# EAGLE board Cool Kup (EAGLE 9.7.0)

Size 293.31 x 112.9 mm. Coordinates in mm from the lower left corner, seen from the top.
Outline: 0,0 293.31,0 293.31,112.9 0,112.9 0,0
Copper layers (1*16): Top 0.035mm / dielectric 1.5mm / Bottom 0.035mm
Design rules "default": minimum track width 6mil, minimum drill 0.35mm, track to track 6mil, track to pad 6mil, pad to pad 6mil, via to via 6mil, smd to smd 6mil, copper to edge 40mil, drill to drill 6mil, minimum pad ring 10mil, minimum via ring 8mil, stop-mask expansion 4mil, vias tented up to drill 0mil, thermal gap 10mil

## Footprints (pad centres in the part's own frame; a part is rotated, then mirrored left to right if it is on the bottom)
BATTERY-GENERIC = drill 1.118 pad 3.15 octagon: + 2.54,0; - -2.54,0
LU-5-R = drill 0.8: 1 -6.35,-3.81; 5 3.81,-3.81; 6 6.35,-3.81; 7 6.35,3.81; 8 3.81,3.81; 12 -6.35,3.81
PIEZO = drill 1 pad 1.6: 1 -3.5,0; 2 3.5,0
RESAD1016W63L850D250B = drill 0.83 pad 1.43: 1 -5.08,0; 2 5.08,0
SWITCH-MOMENTARY-PTH-6.5MM = drill 1.016 pad 1.88: 1 -3.251,2.261; 2 3.251,2.261; 3 -3.251,-2.261; 4 3.251,-2.261

## Placement (x,y rotation side)
BAT1  9V  [BATTERY-GENERIC]  8.26,53.36 0 top
FUNC2  FUNCTION-GENERATOR  [BATTERY-GENERIC]  225.68,41.11 180 top
K1  RELAY-SPDT_LU-5-R  [LU-5-R]  198.91,102.74 180 top
PIEZO1  PIEZO  [PIEZO]  281.58,13.58 0 top
R1  1k  [RESAD1016W63L850D250B]  9.37,76.44 90 top
S1  SWITCH_MOMENTARY  [SWITCH-MOMENTARY-PTH-6.5MM]  11.91,67.55 90 top

## Library data of the parts
BAT1 FUNC2 K1 PIEZO1 R1 S1 = Tinkercad

## Nets
BAT1+: BAT1.+ S1.3
FUNC2+: FUNC2.+ PIEZO1.1
FUNC2-: FUNC2.- PIEZO1.2
S1_2: R1.1 S1.2

## Tracks (layer width: path | path; a pad name or v marks a point on that pad's centre or on a via)
BAT1+  (1 unrouted)
FUNC2+  (1 unrouted)
FUNC2-  (1 unrouted)
S1_2  (1 unrouted)